# Altium PCB LPF-400kHz-OPA820-THT.PcbDoc
Units mm, origin at the board's own origin, x right, y up, seen from the top; angles counter-clockwise.
Board outline 68 x 43 mm, 2 copper layers (Top Layer, Bottom Layer); 28 components, 17 nets, 84 pads, 8 vias.
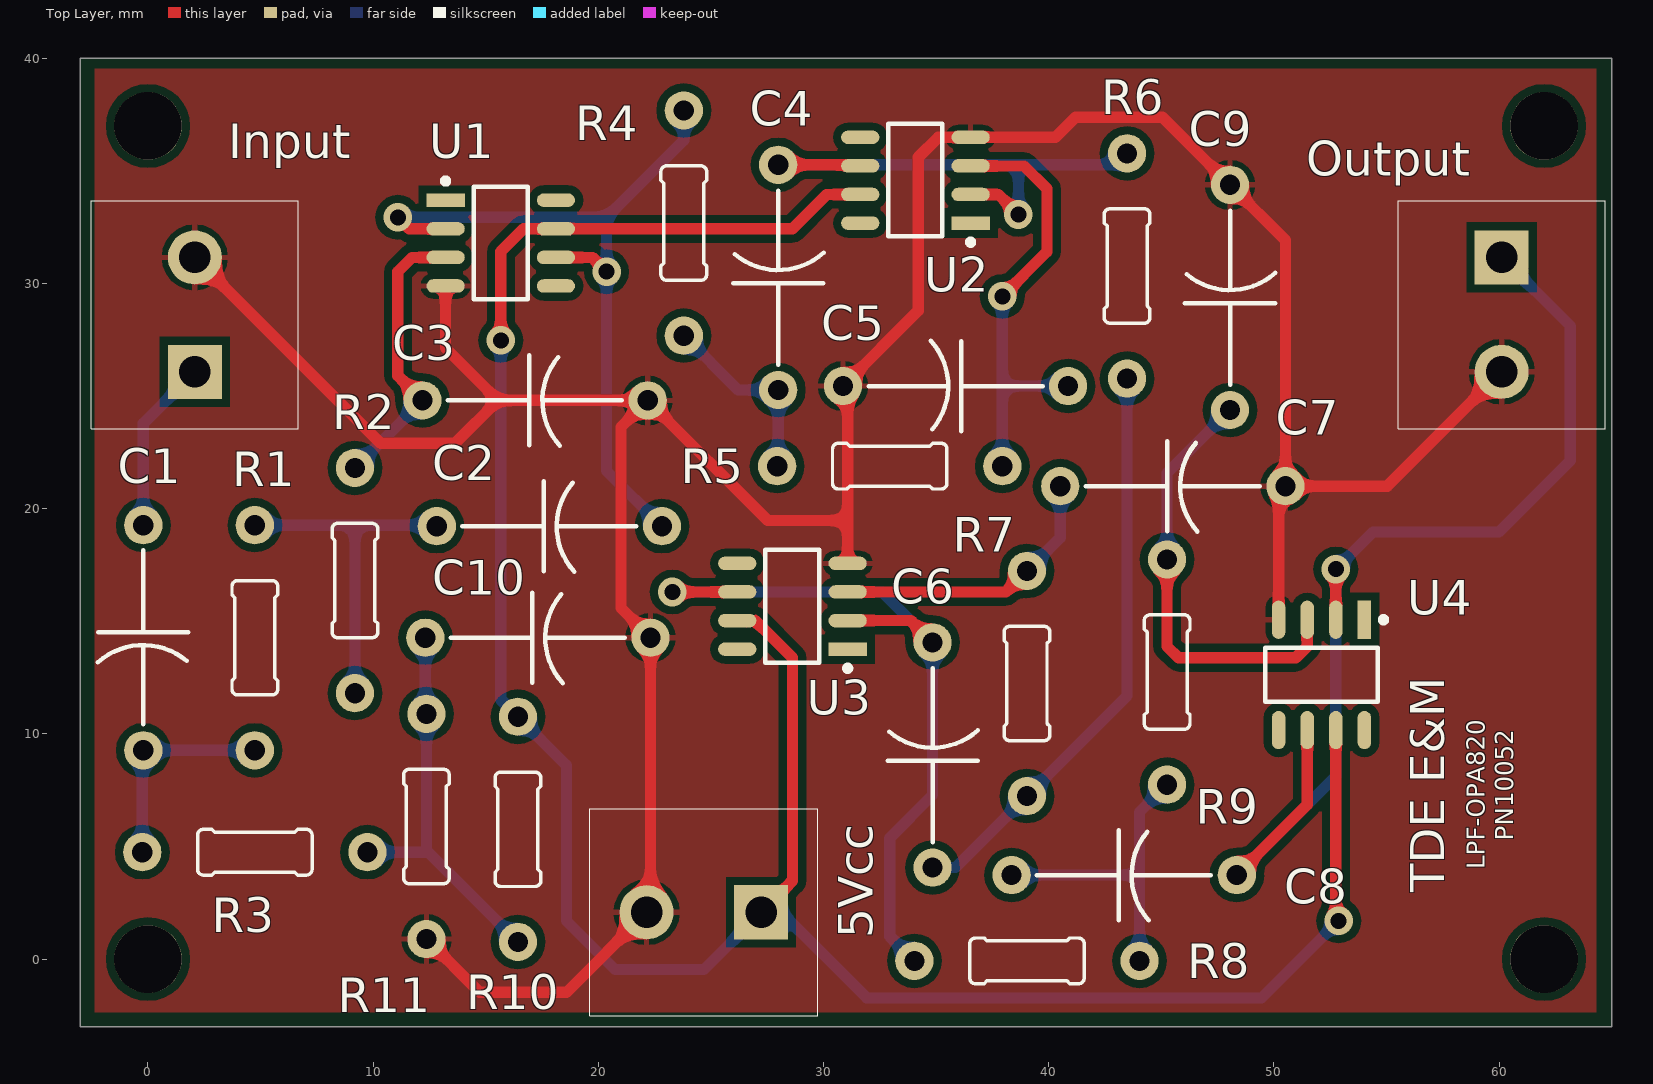
[diagram p0: Top Layer view]
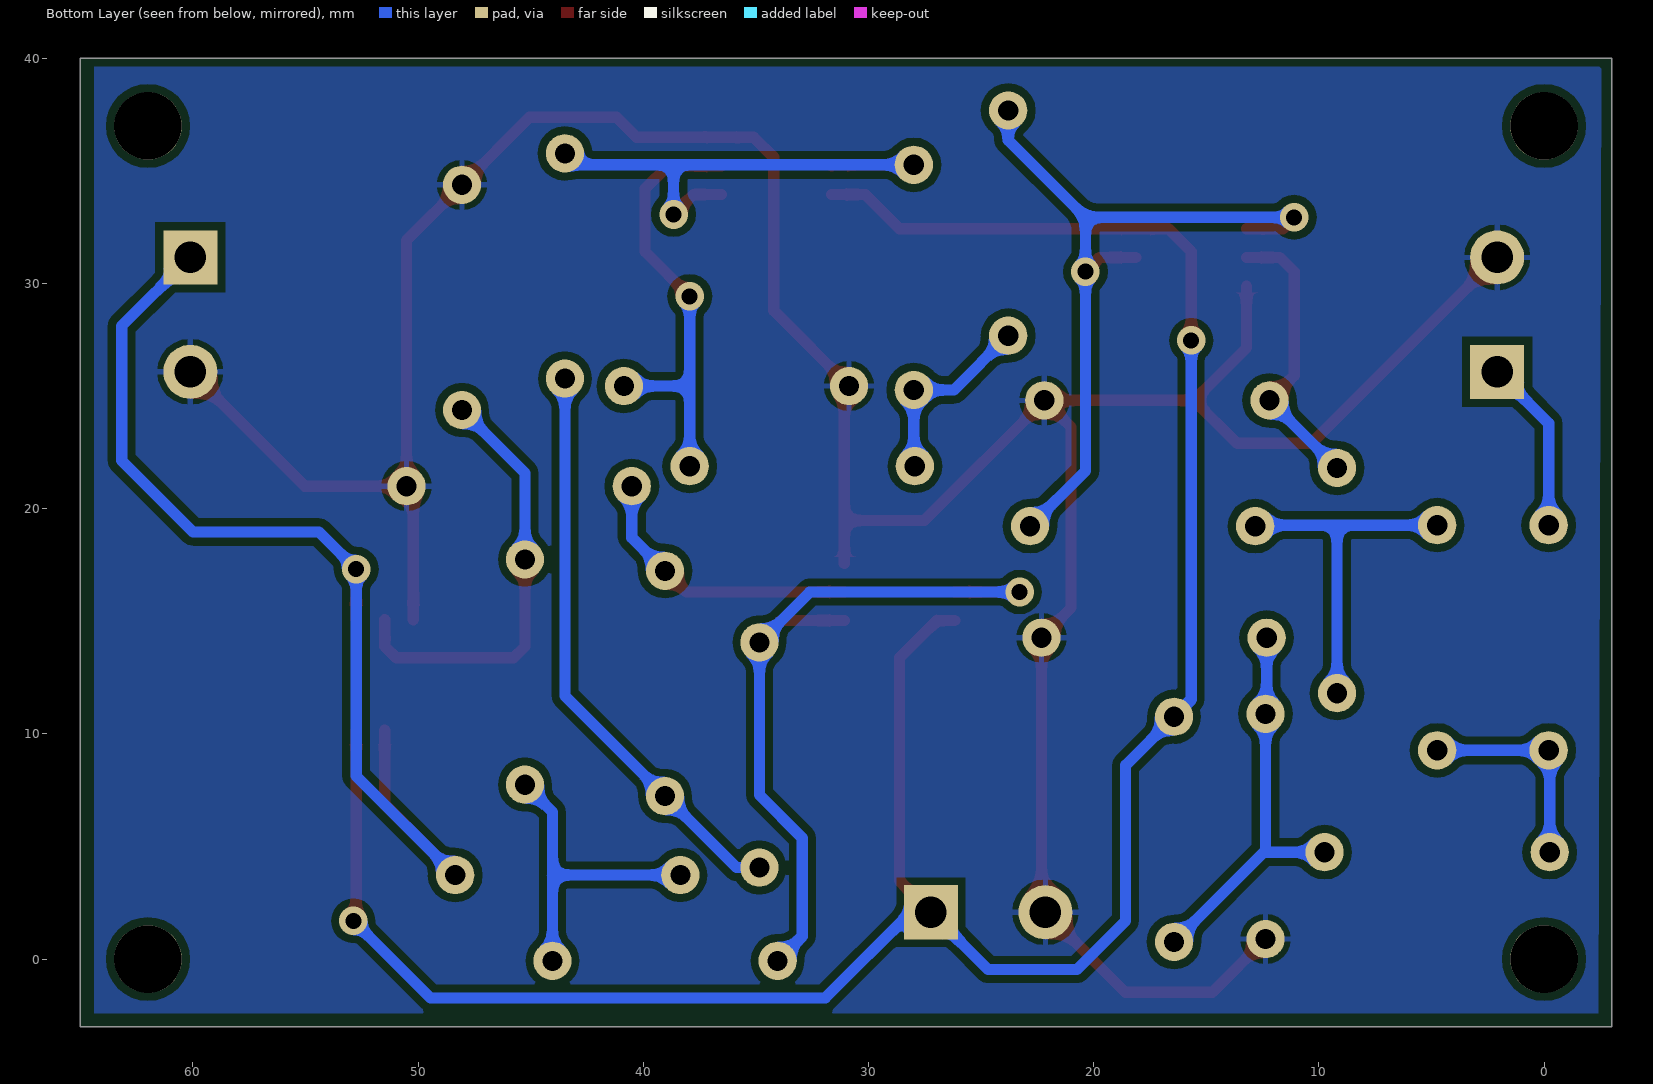
[diagram p1: Bottom Layer view, seen from below]
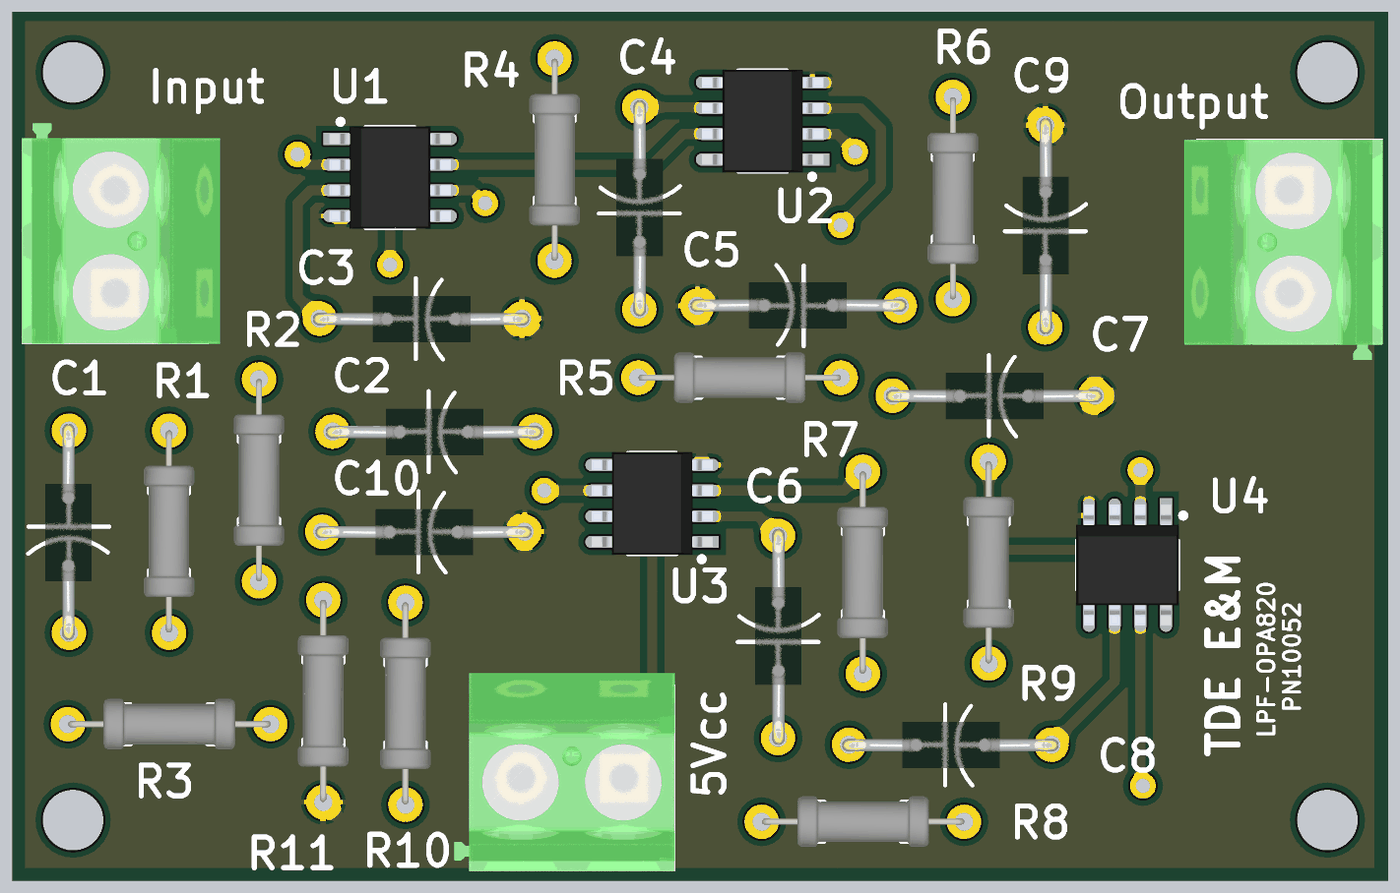
[diagram p2: 3D render of the assembled board from above, using the file's embedded part models]

## Layer stack, top to bottom
Top Solder: solder mask 0.0102, Solder Resist, Dk 3.5
Top Layer: signal copper 0.0356
Dielectric 1: dielectric 0.32, FR-4, Dk 4.8
Bottom Layer: signal copper 0.0356
Bottom Solder: solder mask 0.0102, Solder Resist, Dk 3.5

## Board outline
-3,-3 65,-3 65,40 -3,40

## Design rules (kind name [scope] priority, off if disabled: settings)
Clearance Polygons [InPolygon] p1: gap=0.35
Clearance [All] p2: gap=0.15
MinimumSolderMaskSliver [All] p1: minsoldermaskwidth=0.1
PolygonConnect [All] p1: connectstyle=Relief reliefconductorwidth=0.254 reliefentries=4 polygonreliefangle="90 Angle" airgapwidth=0.254
RoomDefinition LPF-400kHz-OPA820-THT [InComponentClass('LPF-400kHz-OPA820-THT')] p1: confinementstyle=ConfineIn formatcopy=TRUE lockcomponents=FALSE outline -9.985,-11.382 72.057,-11.382 72.057,42.847 -9.985,42.847
RoutingVias [All] p1: holewidth=0.711 width=1.27 viastyle="Through Hole" minholewidth=0 minwidth=0 maxholewidth=0.711 maxwidth=1.27
SilkToSilkClearance [All] p1: silktosilkclearance=0
SilkToSolderMaskClearance [IsPad] p1: minsilkscreentomaskgap=0.1 clearancetoexposedcopper=TRUE
SolderMaskExpansion [All] p1: expansion=0.102
Width [All] p1: maxlimit=4 minlimit=0.254 preferedwidth=0.5
27 further rules are at their usual default settings.

## Components (designator, comment, footprint, x,y, rotation, side; value= is the part's Value field where it differs from the comment)
5Vcc "PHOENIX_1715721" Phoenix-2-5_08 24.686,2.08 r180 top
C1 "Capacitor-Dummy-THT" Dummy-10mm -0.206,14.272 r270 top
C2 "Capacitor-Dummy-THT" Dummy-10mm 17.828,19.225 r0 top
C3 "Capacitor-Dummy-THT" Dummy-10mm 17.193,24.813 r0 top
C4 "Capacitor-Dummy-THT" Dummy-10mm 27.988,30.274 r90 top
C5 "Capacitor-Dummy-THT" Dummy-10mm 35.862,25.448 r180 top
C6 "Capacitor-Dummy-THT" Dummy-10mm 34.846,9.065 r90 top
C7 "Capacitor-Dummy-THT" Dummy-10mm 45.514,21.003 r0 top
C8 "Capacitor-Dummy-THT" Dummy-10mm 43.355,3.731 r0 top
C9 "Capacitor-Dummy-THT" Dummy-10mm 48.054,29.385 r90 top
C10 "Capacitor-Dummy-THT" Dummy-10mm 17.32,14.272 r0 top
Input "PHOENIX_1715721" Phoenix-2-5_08 2.08,28.623 r90 top
Output "PHOENIX_1715721" Phoenix-2-5_08 60.119,28.623 r270 top
R1 "Resistor-Dummy-THT" Dummy-10mm 4.747,14.272 r90 top
R2 "Resistor-Dummy-THT" Dummy-10mm 9.192,16.812 r90 top
R3 "Resistor-Dummy-THT" Dummy-10mm 4.747,4.747 r0 top
R4 "Resistor-Dummy-THT" Dummy-10mm 23.797,32.687 r270 top
R5 "Resistor-Dummy-THT" Dummy-10mm 32.941,21.892 r0 top
R6 "Resistor-Dummy-THT" Dummy-10mm 43.482,30.782 r270 top
R7 "Resistor-Dummy-THT" Dummy-10mm 39.037,12.24 r90 top
R8 "Resistor-Dummy-THT" Dummy-10mm 39.037,-0.079 r0 top
R9 "Resistor-Dummy-THT" Dummy-10mm 45.26,12.748 r90 top
R10 "Resistor-Dummy-THT" Dummy-10mm 16.431,5.763 r90 top
R11 "Resistor-Dummy-THT" Dummy-10mm 12.367,5.89 r90 top
U1 "OPA820ID" SOP8_L 15.669,31.798 r0 top
U2 "OPA820ID" SOP8_L 34.084,34.592 r180 top
U3 "OPA820ID" SOP8_L 28.623,15.669 r180 top
U4 "OPA820ID" SOP8_L 52.118,12.621 r270 top

## Footprints (in the part's own frame and the unit in brackets; to place one, negate y for a bottom-side part, rotate by r counter-clockwise, add the part's x,y. Pads: shape width x height; smd on the part's side, far side on the other; paste and mask are expansions set on the pad)
Dummy-10mm [mm] "Dummy-10mm"
  round 1.7 hole 0.9: 1(-5,0) 2(5,0)
  silkscreen extent -3.88,-2.01 3.85,2, body extent -5.34,-1.16 5.35,1.13, height 7.83
Phoenix-2-5_08 [mm] "Phoenix, 1715721"
  rect 2.4x2.4 hole 1.4: 1(-2.54,0)
  round 2.4 hole 1.4: 2(2.54,0)
  silkscreen extent -5.06,-4.6 5.06,4.6, body extent -5.05,-5.19 5.85,4.61, height 14.2
SOP8_L [mm] "SOIC, 8-Leads, Body 4.9x3.9mm, Pitch 1.27mm, IPC High Density"
  rect 1.7x0.6 smd: 1(-2.45,1.905)
  oval 1.7x0.6 smd: 2(-2.45,0.635) 3(-2.45,-0.635) 4(-2.45,-1.905) 5(2.45,-1.905) 6(2.45,-0.635) 7(2.45,0.635) 8(2.45,1.905)
  silkscreen extent -2.57,-2.5 1.2,2.88, body extent -3,-2.54 3,2.54, height 1.7

## Part data
5Vcc Input Output: library part 2Pol_1715721, "Phoenix, 2 pol, 5.08mm, 22A, 715721"
U1 U2 U3 U4: "High speed OP, 260MHz"

## Free pads (board coordinates)
  round 3 hole 3 unplated: 0(0,0) 1(62,37) 2(62,0) 3(0,37)

## Via types
v1: diameter 1.27, hole 0.711, Top Layer to Bottom Layer, 8 vias

## Nets (pads, with @x,y where several pads share a name; then routed paths per layer and width w, separated by ;. In a path a pad name is that pad's centre, name@x,y a point inside that pad or via, vN(x,y) a via of type N, cw(c..) or ccw(c..) an arc to the next point about the centre after c; other vN are vias at no path point)
5VCC: 5Vcc.1 R10.2 U1.7 U2.7 U3.7 U4.7 | length 110.7
  Top Layer w0.5: v1(15.669,27.48) 15.669,31.417 16.685,32.433 U1.7 28.623,32.433 30.147,33.957 U2.7 ; U3.7 26.972,15.034 28.623,13.383 28.623,3.477 5Vcc.1 ; U4.7 52.753,1.826 v1(52.88,1.699)
  Bottom Layer w0.5: v1(15.669,27.48) 15.669,11.525 R10.2 18.59,8.604 18.59,1.699 20.749,-0.46 24.686,-0.46 5Vcc.1 28.115,2.08 31.925,-1.73 49.451,-1.73 v1(52.88,1.699)
GND: 5Vcc.2 C3.2 C5.2 C7.2 C9.2 C10.2 Input.2 Output.2 R11.1 U1.4 U2.4 U3.4 U4.4 | length 145
  Top Layer w0.5: Input.2 10.335,22.908 13.637,22.908 15.542,24.813 ; R11.1 14.733,-1.476 18.59,-1.476 5Vcc.2 22.32,2.254 C10.2 21.003,15.589 21.003,23.623 C3.2 ; U1.4 13.219,27.136 15.542,24.813 ; U3.4 31.073,19.479 ; U4.4 50.213,20.702 C7.2 ; Output.2 55.039,21.003 C7.2 ; 15.542,24.813 C3.2 ; C3.2 27.527,19.479 31.073,19.479 ; 31.073,19.479 31.073,25.237 C5.2 34.211,28.797 34.211,35.608 35.1,36.497 U2.4 40.307,36.497 41.196,37.386 45.053,37.386 C9.2 50.514,31.925 C7.2
NetC1_1: C1.1 Input.1 | length 7.8
  Bottom Layer w0.5: C1.1 -0.206,23.797 Input.1
NetC1_2: C1.2 R1.1 R3.1 | length 9.4
  Bottom Layer w0.5: R3.1 C1.2@-0.253,9.225 ; C1.2 R1.1
NetC2_1: C2.1 R1.2 R2.1 | length 15.5
  Bottom Layer w0.5: R1.2 9.192,19.272 ; R2.1 9.192,19.272 ; C2.1@12.781,19.272 9.192,19.272
NetC2_2: C2.2 R4.1 U1.2 U1.6 | length 35
  Top Layer w0.5: v1(11.097,32.941) 11.605,32.433 U1.2 ; U1.6 19.733,31.163 v1(20.368,30.528)
  Bottom Layer w0.5: v1(11.097,32.941) 20.368,32.941 ; C2.2 20.368,21.685 v1(20.368,30.528) 20.368,32.941 ; R4.1 23.797,36.37 20.368,32.941
NetC3_1: C3.1 R2.2 U1.3 | length 12.8
  Top Layer w0.5: C3.1 11.097,25.909 11.097,30.528 11.732,31.163 U1.3
  Bottom Layer w0.5: R2.2 C3.1
NetC4_1: C4.1 R4.2 R5.1 | length 8.6
  Bottom Layer w0.5: R4.2 26.21,25.274 C4.1 27.988,21.939 R5.1
NetC4_2: C4.2 R6.1 U2.2 U2.6 | length 24.1
  Top Layer w0.5: C4.2 31.587,35.274 U2.6 ; U2.2 37.767,33.957 v1(38.656,33.068)
  Bottom Layer w0.5: C4.2 38.656,35.274 ; v1(38.656,33.068) 38.656,35.274 ; R6.1 42.974,35.274 38.656,35.274
NetC5_1: C5.1 R5.2 U2.3 | length 19.9
  Top Layer w0.5: U2.3 38.91,35.227 39.926,34.211 39.926,31.417 v1(37.941,29.432)
  Bottom Layer w0.5: R5.2 37.941,25.448 ; v1(37.941,29.432) 37.941,25.448 ; C5.1 37.941,25.448
NetC6_1: C6.1 R6.2 R7.1 | length 25.9
  Bottom Layer w0.5: C6.1 35.862,4.065 R7.1 43.482,11.685 R6.2
NetC6_2: C6.2 R8.1 U3.2 U3.6 | length 34.9
  Top Layer w0.5: v1(23.289,16.304) U3.6 ; U3.2 33.877,15.034 C6.2
  Bottom Layer w0.5: v1(23.289,16.304) 32.607,16.304 C6.2 34.846,7.287 32.941,5.382 32.941,1.017 R8.1
NetC7_1: C7.1 R7.2 U3.3 | length 12.7
  Top Layer w0.5: U3.3 38.101,16.304 R7.2
  Bottom Layer w0.5: R7.2 40.514,18.717 C7.1
NetC8_1: C8.1 R8.2 R9.1 | length 14
  Bottom Layer w0.5: C8.1 44.037,3.731 ; R8.2 44.037,3.731 ; R9.1 44.037,6.525 44.037,3.731
NetC8_2: C8.2 Output.1 U4.2 U4.6 | length 48.1
  Top Layer w0.5: C8.2 51.483,6.859 U4.6 ; U4.2 v1(52.753,17.32)
  Bottom Layer w0.5: C8.2 52.753,8.129 v1(52.753,17.32) 54.404,18.971 59.992,18.971 63.167,22.146 63.167,28.115 Output.1
NetC9_1: C9.1 R9.2 U4.3 | length 19.5
  Top Layer w0.5: R9.2 45.26,13.891 45.768,13.383 50.975,13.383 51.483,13.891 U4.3
  Bottom Layer w0.5: R9.2 45.26,21.591 C9.1
VREF: C10.1 R3.2 R10.1 R11.2 | length 17.9
  Bottom Layer w0.5: R3.2 12.287,4.747 12.367,4.827 ; C10.1 12.32,10.937 R11.2 12.367,4.827 ; R10.1 12.367,4.827
pads on no net: U1.1 U1.5 U1.8 U2.1 U2.5 U2.8 U3.1 U3.5 U3.8 U4.1 U4.5 U4.8

## Polygon pours and split planes (outlines as drawn)
GND on Top Layer "GND-Top" (solid, pour order 0): -2.365,-2.365 64.31,-2.365 64.31,39.545 -2.365,39.545
GND on Bottom Layer "GND-Bottom" (solid, pour order 2): -2.413,-2.413 64.389,-2.413 64.389,39.624 -2.54,39.624

## Silkscreen, mask and mechanical layers (free items; w line width, h text height)
Top Overlay:
  text "PN10052" at 60.627,5.255 h0.8 r90
  text "LPF-OPA820" at 59.357,3.985 h0.8 r90
  text "TDE E&M" at 57.579,2.969 h1.5 r90
Outline:
  the board outline again, w0.1

## Dimensions
65,40 to 65,-3 on Mechanical 16
-3,-3 to 65,-3 on Mechanical 16